# Altium PCB PCB1.PcbDoc
Units mil, origin at the board's own origin, x right, y up, seen from the top; angles counter-clockwise.
Board outline 6000 x 4000 mil, 2 copper layers (Top Layer, Bottom Layer); 60 components, 0 nets, 237 pads, 193 vias.
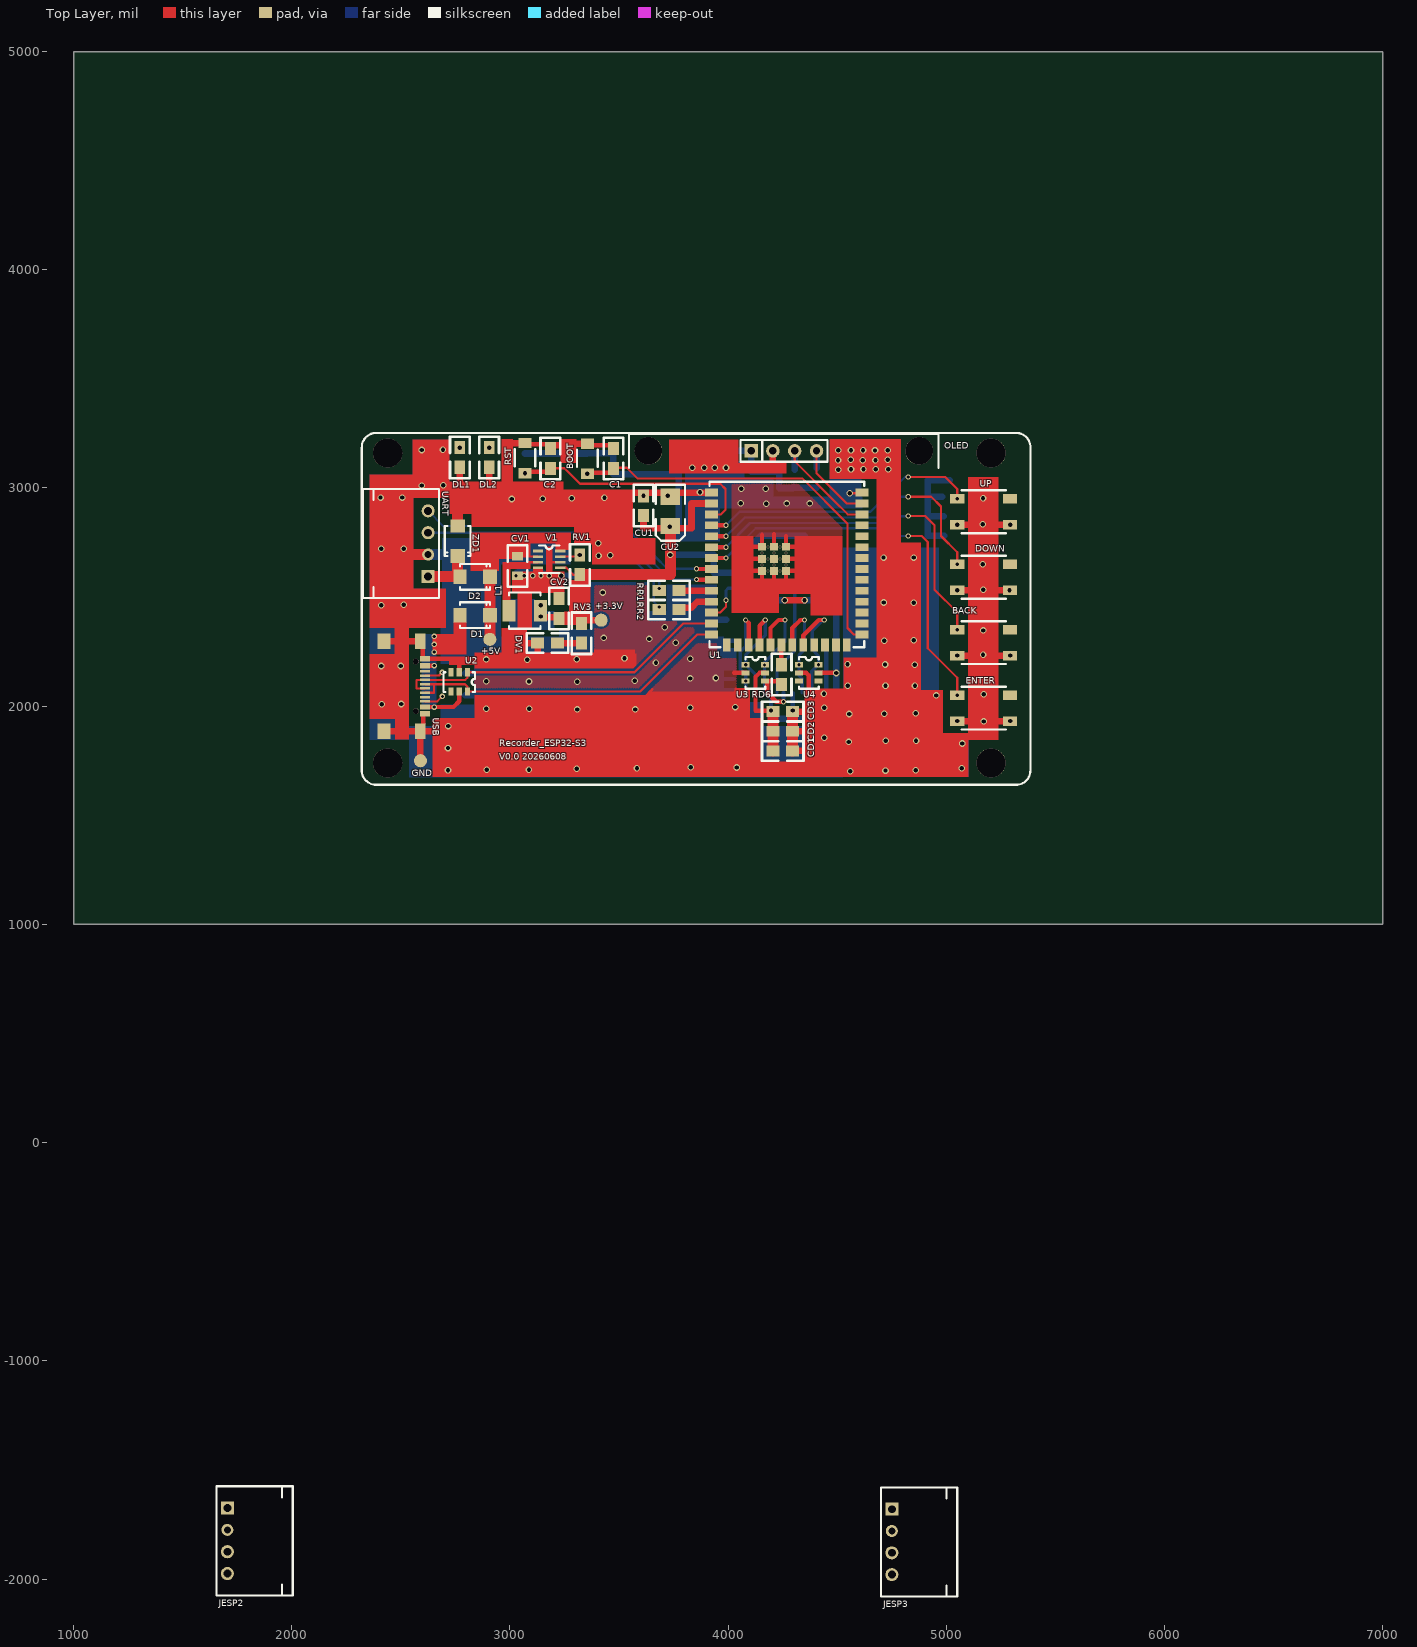
[diagram p0: Top Layer view]
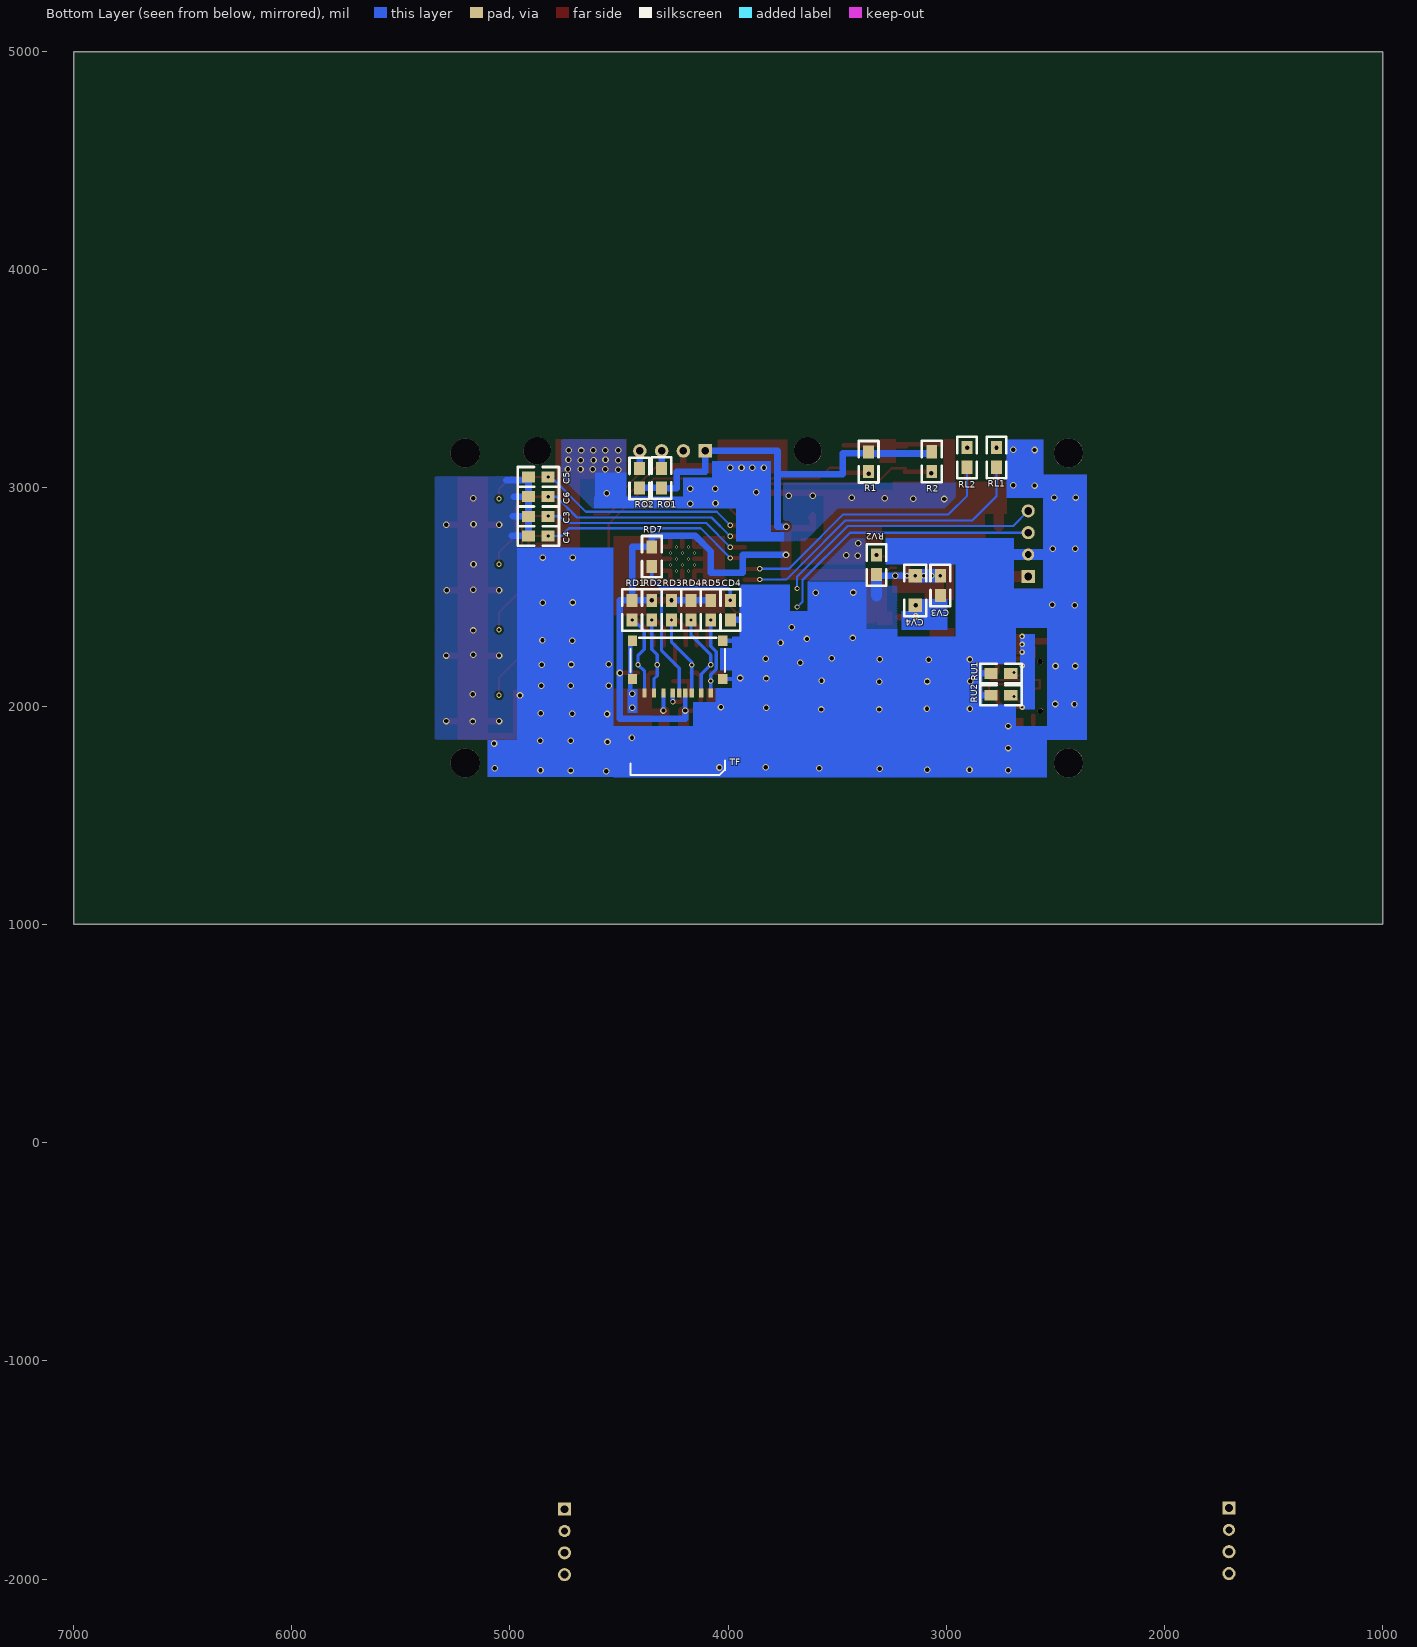
[diagram p1: Bottom Layer view, seen from below]

## Layer stack, top to bottom
Top Solder: solder mask 0.4, Solder Resist, Dk 3.5
Top Layer: signal copper 1.4
Dielectric 1: dielectric 12.6, FR-4, Dk 4.8
Bottom Layer: signal copper 1.4
Bottom Solder: solder mask 0.4, Solder Resist, Dk 3.5

## Board outline
1000,1000 7000,1000 7000,5000 1000,5000

## Design rules (kind name [scope] priority, off if disabled: settings)
Clearance [All] p1: gap=10
PolygonConnect [All] p1: connectstyle=Relief reliefconductorwidth=10 reliefentries=4 polygonreliefangle="90 Angle" airgapwidth=10
RoutingVias [All] p1: holewidth=28 width=50 viastyle="Through Hole" minholewidth=28 minwidth=50 maxholewidth=28 maxwidth=50
SolderMaskExpansion [All] p1: expansion=4
Width [All] p1: maxlimit=10 minlimit=10 preferedwidth=10
30 further rules are at their usual default settings.

## Components (designator, comment, footprint, x,y, rotation, side; value= is the part's Value field where it differs from the comment)
BACK "Comment" SW-4.5*4.5 5050,2350 r0 top
BOOT "Comment" SW-3*4 3355,3202.8 r270 top
C1 "Comment" 0805#1 3475,3180 r270 top
C2 "Comment" 0805#1 3185,3180 r270 top
C3 "Comment" 0805#1 4915,2870 r180 bottom
C4 "Comment" 0805#1 4915,2780 r180 bottom
C5 "Comment" 0805#1 4915,3051 r180 bottom
C6 "Comment" 0805#1 4915,2960 r180 bottom
CD1 "Comment" 0805#2 4205,1795 r0 top
CD2 "Comment" 0805#3 4205,1885 r0 top
CD3 "Comment" 0805#3 4205,1975 r0 top
CD4 "Comment" 0805#4 3990,2485 r270 bottom
CU1 "Comment" 0805#3 3612,2964 r270 top
CU2 "Comment" B-3528 3735,2825.35 r90 top
CV1 "Comment" 0805#5 3035,2597.63 r90 top
CV2 "Comment" 0805#3 3225,2402.63 r90 top
CV3 "Comment" 0805#3 3027.63,2507.63 r90 bottom
CV4 "Comment" 1206 3142.63,2462.63 r90 bottom
D1 "Comment" SMA#1 2908,2417.01 r180 top
D2 "Comment" SMA#1 2908,2592.8 r180 top
DL1 "Comment" 0805#4 2770,3185 r270 top
DL2 "Comment" 0805#4 2905,3185 r270 top
DOWN "Comment" SW-4.5*4.5 5050,2650 r0 top
DV1 "Comment" 0805#4 3217,2289 r180 top
ENTER "Comment" SW-4.5*4.5 5050,2050 r0 top
JESP2 "Comment" XH2.54W-4P#1 1705,-1675 r270 top
JESP3 "Comment" XH2.54W-4P#1 4750,-1680 r270 top
L1 "Comment" 0420 3140.67,2437.63 r180 top
OLED "Comment" OLED-1.3-IIC 4254.92,3170 r0 top
R1 "Comment" 0805#6 3356,3075 r90 bottom
R2 "Comment" 0805#6 3067,3076 r90 bottom
RD1 "Comment" 0805#3 4440,2485 r270 bottom
RD2 "Comment" 0805#3 4350,2485 r270 bottom
RD3 "Comment" 0805#3 4260,2485 r270 bottom
RD4 "Comment" 0805#3 4170,2485 r270 bottom
RD5 "Comment" 0805#3 4080,2485 r270 bottom
RD6 "Comment" 0805#3 4245,2190 r270 top
RD7 "Comment" 0805#7 4350,2730 r270 bottom
RL1 "Comment" 0805#3 2770,3185 r270 bottom
RL2 "Comment" 0805#3 2905,3185 r270 bottom
RO1 "Comment" 0805#3 4306,3090 r270 bottom
RO2 "Comment" 0805#3 4407,3089 r270 bottom
RR1 "Comment" 0805#3 3774,2530 r180 top
RR2 "Comment" 0805#3 3774,2443 r180 top
RST "Comment" SW-3*4 3069,3205.8 r270 top
RU1 "Comment" 0805#1 2795,2150 r180 bottom
RU2 "Comment" 0805#1 2795,2050 r180 bottom
RV1 "Comment" 0805#3 3320,2602.63 r90 top
RV2 "Comment" 0805#3 3320,2602.63 r90 bottom
RV3 "Comment" 0805#3 3328,2379 r270 top
TF "Comment" "TF Card" 4231.69,2124.8 r0 bottom
U1 "Comment" "ESP32-S3 module" 3894.92,2978.82 r0 top
U2 "Comment" "TSOP-6 SRV05-4" 2804.8,2155.58 r270 top
U3 "Comment" "TSOP-6 SRV05-4" 4080,2190 r0 top
U4 "Comment" "TSOP-6 SRV05-4" 4325,2190 r0 top
UART "Comment" XH2.54W-4P#2 2625,2595 r90 top
UP "Comment" SW-4.5*4.5 5050,2950 r0 top
USB "Comment" "TYPE-C USB T" 2569,2091 r270 top
V1 "Comment" TSOT23-8 3180,2672.63 r0 top
ZD1 "Comment" SMA#2 2760,2687.99 r90 top

## Footprints (in the part's own frame and the unit in brackets; to place one, negate y for a bottom-side part, rotate by r counter-clockwise, add the part's x,y. Pads: shape width x height; smd on the part's side, far side on the other; paste and mask are expansions set on the pad)
0420 [mm]
  rect 1.5x2.5 smd paste+0 mask+0.051: 1(0,0) 2(3.7,0)
  silkscreen extent 0,-2.1 3.7,2.1
0805#1 [mil]
  rect 60x50 smd: 2(90,0) GND(0,0)
  silkscreen extent -50,-45 140,45
0805#2 [mil]
  rect 60x50 smd: +3.3V(0,0) GND(90,0)
  silkscreen extent -50,-45 140,45
0805#3 [mil]
  rect 60x50 smd: 1(0,0) 2(90,0)
  silkscreen extent -50,-45 140,45
0805#4 [mil]
  rect 60x50 smd: 1(0,0) GND(90,0)
  silkscreen extent -50,-45 140,45
0805#5 [mil]
  rect 40x50 smd: 1(0,0) 2(90,0)
  silkscreen extent -50,-45 140,45
0805#6 [mil]
  rect 60x50 smd: 1(0,0) +3.3V(90,0)
  silkscreen extent -50,-45 140,45
0805#7 [mil]
  rect 60x50 smd: 2(90,0) +3.3V(0,0)
  silkscreen extent -50,-45 140,45
1206 [mil]
  rect 60x60 smd: 1(0,0) GND(135,0)
  silkscreen extent -50,-50 185,50
B-3528 [mm]
  rect 1.9x2.28 smd paste+0 mask+0.051: 1(0,0) 2(3.42,0)
  silkscreen extent -1.7,-1.7 4.8,1.7
"ESP32-S3 module" [mm]
  rect 1.5x0.9 smd paste+0 mask+0.051: 1(0.75,0) 2(0.75,-1.27) 3(0.75,-2.54) 4(0.75,-3.81) 5(0.75,-5.08) 6(0.75,-6.35) 7(0.75,-7.62) 8(0.75,-8.89) 9(0.75,-10.16) 10(0.75,-11.43) 11(0.75,-12.7) 12(0.75,-13.97) 13(0.75,-15.24) 14(0.75,-16.51) 27(18.25,-16.51) 28(18.25,-15.24) 29(18.25,-13.97) 30(18.25,-12.7) 31(18.25,-11.43) 32(18.25,-10.16) 33(18.25,-8.89) 34(18.25,-7.62) 35(18.25,-6.35) 36(18.25,-5.08) 37(18.25,-3.81) 38(18.25,-2.54) 39(18.25,-1.27) 40(18.25,0)
  rect 0.9x1.5 smd paste+0 mask+0.051: 15(2.515,-17.76) 16(3.785,-17.76) 17(5.055,-17.76) 18(6.325,-17.76) 19(7.595,-17.76) 20(8.865,-17.76) 21(10.135,-17.76) 22(11.405,-17.76) 23(12.675,-17.76) 24(13.945,-17.76) 25(15.215,-17.76) 26(16.485,-17.76)
  rect 0.9x0.9 smd paste+0 mask+0.051: ""(6.6,-9.12) ""(6.6,-7.72) ""(6.6,-6.32) ""(8,-9.12) ""(8,-7.72) ""(8,-6.32) ""(9.4,-9.12) ""(9.4,-7.72) ""(9.4,-6.32)
  silkscreen extent 0.5,-18.01 18.5,1.27
OLED-1.3-IIC [mil]
  round 125.98 hole 125.98: 2(-620.08,0) 2(620.08,0)
  round 62 hole 34: GND(-50,0) SCL(50,0) SDA(150,0)
  rect 62x62 hole 34: VCC(-150,0)
  silkscreen extent -709,-79 709,79
SMA#1 [mm]
  rect 1.6x1.68 smd paste+0 mask+0.051: 1(0,0)
  rect 1.52x1.68 smd paste+0 mask+0.051: 2(3.48,0)
  silkscreen extent 0,-1.5 3.48,1.5
SMA#2 [mm]
  rect 1.6x1.68 smd paste+0 mask+0.051: 1(0,0)
  rect 1.52x1.68 smd paste+0 mask+0.051: GND(3.48,0)
  silkscreen extent 0,-1.5 3.48,1.5
SW-3*4 [mm]
  rect 1.2x1.5 smd paste+0 mask+0.051: 1(0,0) 2(3.5,0)
  silkscreen extent 0.7,-1.2 2.7,1.2
SW-4.5*4.5 [mm]
  rect 1.65x1.1 smd paste+0 mask+0.051: 1(0,0) 2(6.15,0) 3(0,-3) 4(6.15,-3)
  silkscreen extent 0.5,-4 5.65,1
"TF Card" [mm]
  rect 1.1x1.2 smd paste+0 mask+0.051: G(-5.25,-4.45) G(-5.25,0) G(5.25,-4.45) G(5.25,0)
  rect 0.5x1.08 smd paste+0 mask+0.051: G(-0.2,1.64) P1(-3.85,1.64) P2(-2.75,1.64) P3(-1.65,1.64) P4(-0.9,1.64) P5(0.55,1.64) P6(1.65,1.64) P7(2.75,1.64) P8(3.85,1.64)
  silkscreen extent -5.5,-4.8 5.5,11.2
"TSOP-6 SRV05-4" [mm]
  rect 0.95x0.6 smd paste+0 mask+0.051: 1(0,0) 2(0,-0.95) 3(0,-1.9) 4(2.25,-1.9) 5(2.25,-0.95) 6(2.25,0)
  silkscreen extent 0,-2.79 2.29,0.89
TSOT23-8 [mm]
  rect 1.2x0.3 smd paste+0 mask+0.051: 1(-1.3,0.975) 2(-1.3,0.325) 3(-1.3,-0.325) 4(-1.3,-0.975) 5(1.3,-0.975) 6(1.3,-0.325) 7(1.3,0.325) 8(1.3,0.975)
  silkscreen extent -1.2,-1.6 1.2,1.6
"TYPE-C USB T" [mm]
  round 0.65 hole 0.65: 0(-2.89,0) 0(2.89,0)
  rect 1.8x1.2 smd paste+0 mask+0.051: 1(-5.225,0.5) 1(5.225,0.5)
  rect 1.8x1.5 smd paste+0 mask+0.051: 1(-5.225,-3.7) 1(5.225,-3.7)
  rect 0.6x1.15 smd paste+0 mask+0.051: 1(-3.2,1.05) 2(-2.4,1.05) 11(2.4,1.05) 12(3.2,1.05)
  rect 0.3x1.15 smd paste+0 mask+0.051: 3(-1.75,1.05) 4(-1.25,1.05) 5(-0.75,1.05) 6(-0.25,1.05) 7(0.25,1.05) 8(0.75,1.05) 9(1.25,1.05) 10(1.75,1.05)
  silkscreen extent -3.5,-6.28 3.5,-6.28
XH2.54W-4P#1 [mil]
  round 60 hole 36: 3(200,0) 4(300,0)
  rect 60x60 hole 36: GND(0,0)
  round 55.12 hole 31.5: VCC(100,0)
  silkscreen extent -100,-50 400,300
XH2.54W-4P#2 [mil]
  round 55.12 hole 31.5: GND(100,0)
  round 60 hole 36: RXD(300,0) TXD(200,0)
  rect 60x60 hole 36: VCC(0,0)
  silkscreen extent -100,-50 400,300

## Free pads (board coordinates)
  round 133.86 hole 133.86: 2(2440,1740) 2(2440,3160) 2(5205,1740) 2(5205,3160)
  round 60 smd: +3.3V(3418,2394) +5V(2908,2306) GND(2590,1750)

## Via types
v1: diameter 30, hole 20, Top Layer to Bottom Layer, 141 vias
v2: diameter 24, hole 15, Top Layer to Bottom Layer, 33 vias
v3: diameter 13.78, hole 9.84, Top Layer to Bottom Layer, 12 vias
v4: diameter 25, hole 14, Top Layer to Bottom Layer, 7 vias

## Nets (pads, with @x,y where several pads share a name; then routed paths per layer and width w, separated by ;. In a path a pad name is that pad's centre, name@x,y a point inside that pad or via, vN(x,y) a via of type N, cw(c..) or ccw(c..) an arc to the next point about the centre after c; other vN are vias at no path point)
pads on no net: BACK.1 BACK.2 BACK.3 BACK.4 BOOT.1 BOOT.2 C1.2 C1.GND C2.2 C2.GND C3.2 C3.GND C4.2 C4.GND C5.2 C5.GND C6.2 C6.GND CD1.+3.3V CD1.GND CD2.1 CD2.2 CD3.1 CD3.2 CD4.1 CD4.GND CU1.1 CU1.2 CU2.1 CU2.2 CV1.1 CV1.2 CV2.1 CV2.2 CV3.1 CV3.2 CV4.1 CV4.GND D1.1 D1.2 D2.1 D2.2 DL1.1 DL1.GND DL2.1 DL2.GND DOWN.1 DOWN.2 DOWN.3 DOWN.4 DV1.1 DV1.GND ENTER.1 ENTER.2 ENTER.3 ENTER.4 JESP2.3 JESP2.4 JESP2.GND JESP2.VCC JESP3.3 JESP3.4 JESP3.GND JESP3.VCC L1.1 L1.2 OLED.2 OLED.GND OLED.SCL OLED.SDA OLED.VCC R1.1 R1.+3.3V R2.1 R2.+3.3V RD1.1 RD1.2 RD2.1 RD2.2 RD3.1 RD3.2 RD4.1 RD4.2 RD5.1 RD5.2 RD6.1 RD6.2 RD7.2 RD7.+3.3V RL1.1 RL1.2 RL2.1 RL2.2 RO1.1 RO1.2 RO2.1 RO2.2 RR1.1 RR1.2 RR2.1 RR2.2 RST.1 RST.2 RU1.2 RU1.GND RU2.2 RU2.GND RV1.1 RV1.2 RV2.1 RV2.2 RV3.1 RV3.2 TF.G TF.P1 TF.P2 TF.P3 TF.P4 TF.P5 TF.P6 TF.P7 TF.P8 U1. U1.1 U1.2 U1.3 U1.4 U1.5 U1.6 U1.7 U1.8 U1.9 U1.10 U1.11 U1.12 U1.13 U1.14 U1.15 U1.16 U1.17 U1.18 U1.19 U1.20 U1.21 U1.22 U1.23 U1.24 U1.25 U1.26 U1.27 U1.28 U1.29 U1.30 U1.31 U1.32 U1.33 U1.34 U1.35 U1.36 U1.37 U1.38 U1.39 U1.40 U2.1 U2.2 U2.3 U2.4 U2.5 U2.6 U3.1 U3.2 U3.3 U3.4 U3.5 U3.6 U4.1 U4.2 U4.3 U4.4 U4.5 U4.6 UART.GND UART.RXD UART.TXD UART.VCC UP.1 UP.2 UP.3 UP.4 USB.0 USB.1 USB.2 USB.3 USB.4 USB.5 USB.6 USB.7 USB.8 USB.9 USB.10 USB.11 USB.12 V1.1 V1.2 V1.3 V1.4 V1.5 V1.6 V1.7 V1.8 ZD1.1 ZD1.GND
copper on no net: | length 36801.2
  Top Layer w10: 2610.34,2022.1 2667.1,2022.1 v4(2690,2045) ; 2610.34,2061.47 2652,2061.47 2652,2100.84 ; 2610.34,2081.16 2572,2081.16 2572,2120.53 2610.34,2120.53 2795.53,2120.53 2804.8,2129.8 2804.8,2155.58 3570.58,2155.58 3793.82,2378.82 3924.45,2378.82 ; 2610.34,2100.84 2652,2100.84 ; 2610.34,2140.21 2675.21,2140.21 v4(2690,2155) ; 3047.8,2685.42 3128.82,2685.42 ; 3071,2647 3083.83,2659.83 3128.82,2659.83 ; 3185,3090 3250,3090 3321,3019 3964,3019 3988,2995 3988,2900 3966.82,2878.82 3924.45,2878.82 ; 3231.18,2634.24 3258.39,2634.24 3290,2602.63 3335,2602.63 ; 3231.18,2685.42 v1@3322.8,2685.42 ; 3478,3093 3535,3093 3584,3044 4339,3044 4547,2836 4547,2358 4576.18,2328.82 4613.43,2328.82 ; 3527,2177 3563,2177 3573,2187 ; 3615,2040 3653.51,2078.51 ; 3774,2539 3784.18,2528.82 ; 3784,2461 3795,2450 ; 3924.45,2328.82 3858.82,2328.82 3597,2067 2804.8,2067 2804.8,2090.2 2794.16,2100.84 2652,2100.84 ; 3924.45,2428.82 3963.82,2428.82 3990,2455 v2(3990,2485) ; 4035,2040 4035,2081.38 ; 4304.92,3170 4304.92,3122.08 4483,2944 4548.18,2878.82 4613.43,2878.82 ; 4404.92,3170 4404.92,3067.08 4511,2961 4543.18,2928.82 4613.43,2928.82 ; v1@4495.4,2152.6 v1(4496,2152) ; v1(4557,2976) 4610.61,2976 ; v2(4825,2780) 4887,2780 4915,2752 4915,2265 5050,2130 v2(5050,2050) ; v2(4825,2871) 4904,2871 4945,2830 4945,2535 5050,2430 v2(5050,2350) ; v2(4825,2960) 4930,2960 4975,2915 4975,2780 5050,2705 v2(5050,2650) ; v2(4825,3050) 4995,3050 5050,2995 v2(5050,2950)
  Top Layer w20: 2600,2227 2600,2267 ; 2602,1917 2602,1957 ; 2610.34,2216.98 2743.02,2216.98 ; 2610.85,1996 v4(2653,1996) 2741,1996 2767.4,2022.4 2767.4,2067 ; 2610.85,2186 v4(2653,2186) ; 2767.4,2155.58 2767.4,2192.6 ; 3075,3200 3185,3200 ; v1@3080,3075 3190,3075 ; 3360,3195 3470,3195 ; v1@3365,3070 3475,3070 ; v2@3856.18,2578.82 3924.45,2578.82 ; v2@3856.18,2628.82 3924.45,2628.82 ; 3924.45,2678.82 v2(3990,2678.82) ; 3924.45,2728.82 v2(3990,2728.82) ; 3924.45,2778.82 v2(3990,2778.82) ; 3924.45,2828.82 v2(3990,2828.82) ; 4027.03,2152.6 4080,2152.6 ; v2(4080,2395) 4093.94,2381.06 4093.94,2279.61 ; 4103.76,2619.76 4154.76,2619.76 4154.76,2575.24 ; 4109,2730 4154.76,2730 4154.76,2785.24 ; 4110.12,2674.88 4154.76,2674.88 ; 4143.94,2279.61 4143.94,2368.94 v2(4170,2395) ; 4168.58,2152.6 4143.6,2152.6 4125,2134 4125,1979 v1@4201,1979 ; 4193.94,2279.61 4193.94,2357.94 4231,2395 v2(4260,2395) ; 4209.88,2574.12 4209.88,2619.76 ; 4209.88,2730 4209.88,2789.05 ; 4243.94,2191.06 4243.94,2279.61 ; 4251,2114 4178.58,2114 4178.58,2061.42 4220,2020 v2(4253.35,2020) ; 4265,2575 4265,2619.76 4313.76,2619.76 ; 4265,2674.88 4317.12,2674.88 ; 4265,2779.42 4265,2730 4313,2730 ; 4293.94,2279.61 4293.94,2357.94 4331,2395 v2(4350,2395) ; 4325,2152.6 4357.4,2152.6 4369,2141 4369,2064 ; 4343.94,2279.61 4343.94,2323.94 4415,2395 v2(4440,2395) ; 4413.58,2152.6 v1@4495.4,2152.6
  Top Layer w30: 2423.33,1885.29 2488.29,1885.29 ; 2423.33,2296.71 2490.71,2296.71 ; 2511.29,2296.71 2588.68,2296.71 ; 2516.71,1885.29 2588.68,1885.29 ; 2588.68,1751.32 2588.68,1885.29 ; 2657.71,1885.29 2588.68,1885.29 ; 2770,3007 2770,3095 ; 2905,3012 2905,3095 ; 2999.2,3205.8 3069,3205.8 ; 3060,2289 3127,2289 3127,2225 ; v1@3150,2407.63 3220,2407.63 ; 3186,3195 3275,3195 ; 3217,2289 3328,2289 ; 3264.2,3202.8 3355,3202.8 ; 3334,2394 3418,2394 ; 3531,2979 3612,2979 ; v1@3610,2978.82 3924.45,2978.82 ; 3612,2874 3612,2816 3725.65,2816 3832,2816 3832,2928.82 3924.45,2928.82 ; 3615,2863 3619,2863 ; 3774,2528.82 3924.45,2528.82 ; 3795,2450 3830,2450 3858.82,2478.82 3924.45,2478.82 ; 4204.92,3096.08 4204.92,3170 ; v1(4260,2485) v1(4350,2485) ; 4295,1795 4373,1795 ; 4295,1885 4370,1885 ; v1@4295,1975 4351,1975 ; v1(5050,1931.89) 5116.89,1931.89 ; v1(5050,2231.89) 5121.11,2231.89 ; v1(5050,2531.89) 5114.11,2531.89 ; v1(5050,2831.89) 5135.11,2831.89 ; 5217.89,1931.89 v1(5292.13,1931.89) ; 5225.11,2531.89 v1@5292.13,2531.89 ; 5225.11,2831.89 v1(5292.13,2831.89) ; 5227.11,2231.89 v1(5292.13,2231.89)
  Top Layer w50: 2514,2695 2625,2695 ; 2625,2595 2760,2595 ; 2760,2595.79 2760,2687.99 ; 2760,2825 2760,2898 ; 2908,2306 2908,2417.01 2908,2592.8 ; 3320,2602.63 3735,2602.63 v1@3735,2820.35 ; 4205,1795 v1@4205,1975 ; 4295,1795 v1@4295,1975
  Bottom Layer w10: 2625,2795 3442,2795 3659,2578 3659,2479 v2(3684,2454) ; 2625,2895 2695,2825 3453,2825 3684,2594 v2(3684,2539) ; 2770,3095 2770,2962 2881,2851 3463,2851 3661,2653 3734,2580 v2(3855,2580) ; 2905,3095 2905,2964 2990,2879 3472,2879 3665,2686 3721,2630 v2(3855,2630) ; 3125,2475 v1@3140,2460 ; 3632,2552 3632,2568 ; v2(3990,2678.82) 4126.18,2815 4729,2815 4764,2780 v2(4825,2780) ; v2(3990,2728.82) 4100.18,2839 4741,2839 4772,2870 v2@4825,2870 ; v2(3990,2778.82) 4076.18,2865 4693,2865 4788,2960 v2(4825,2960) ; v2(3990,2828.82) 4052.18,2891 4652,2891 4812,3051 v2@4825,3051 ; v2@4435,2395 v2(4440,2395)
  Bottom Layer w15: v2(3990,2485) 3990,2530 4000,2540 4305,2540 ; v2(4080,2115.2) 4080,2145 4055,2170 4055,2250 4080,2275 v2(4080,2395) ; 4080.12,2060.24 v2@4080.12,2115.2 ; 4123.43,2060.24 4123.43,2146.57 v2(4080,2190) 4080,2235 4170,2325 v2(4170,2395) ; 4166.73,2060.24 v2(4166.73,2188.15) 4166.73,2201.73 4260,2295 v2(4260,2395) ; 4223.82,2060.24 4223.82,2173.82 4305,2255 4305,2540 ; 4339.96,2060.24 4339.96,2125.04 4325,2140 v2(4325,2190) 4325,2235 4350,2260 v2(4350,2395) ; 4350,2640 4350,2585 4305,2540 ; 4383.27,2060.24 4383.27,2159.68 v2(4413.58,2190) 4413.58,2231.42 4385,2260 4385,2345 v2@4435,2395
  Bottom Layer w20: v4(2653,1996) v4(2653,2186) v4(2653,2320) ; 3974,2300 4025,2300 ; 3982.8,2124.8 4025,2124.8 ; v1(4196.26,1980) 4196.26,2060.24 ; v2(4253.35,2020) 4253.35,2060.24 ; v1(4296.65,1980) 4296.65,2060.24 ; v1@4449.39,2059 4449.39,2299
  Bottom Layer w30: 2795,2050 2870,2050 ; 2795,2150 2866,2150 ; 3069,3158 3353,3158 ; v2(3142.63,2597.63) v1(3235,2597.63) 3315,2597.63 ; 3355,3160 3474,3160 3474,3063 3774,3063 3774,3170 4104.92,3170 4104.92,3074.92 4234.92,3074.92 4234.92,2999 4294.84,2999 4300.92,3005.08 ; v1(3733,2823) 3774,2823 3774,3075 ; v1(3735,2693) 3933,2693 3933,2612 4080,2612 4080,2710 4150,2780 4350,2780 4350,2730 4440,2730 4440,2485 ; 3930,2395 3990,2395 ; 4080,2485 v1(4260,2485) ; v1(4196.26,1980) 4196.26,1941.74 4496,1941.74 4496,2485 4440,2485 ; 4304.92,3084.08 4304.92,3170 ; 4306,3000 4406,3000 ; v1(4350,2485) 4440,2485 ; 4404.92,3091.08 4404.92,3170 ; 4915,2960 4981.51,2960 ; 4916,2871 4988.02,2871 ; 4991,2780 4915,2780 4915,3036.08 5016.05,3036.08
  Bottom Layer w50: 2528,2695 2625,2695 2723,2695 ; 3320,2504.45 3320,2602.63
  Bottom Layer w60: 3040,2597.63 v2(3142.63,2597.63)
  other v1: 4559,1701 4721,1705 2716,1707 4860,1707 2894,1709 3087,1709 3306,1713 5070,1715 3582,1716 4040,1719 3828,1720 2716,1808 5073,1829 4553,1836 4861,1841 4722,1842 4441,1855 2717,1909 5171,1930 4555,1964 4715,1966 4859,1968 3308,1985 3574,1985 2892,1988 3089,1988 4440,1992 3826,1993 4033,1996 2413,2008 2501,2010 4954,2049 5171,2054 4439,2057 4548,2093 4721,2094 4856,2094 3308,2112.39 3087.29,2113 2891,2114 3572,2116.18 3826,2127 3944,2129 2410,2184 2500,2184 4855,2190 4719,2191 4547,2192 3669,2198.79 3080,2213 2892,2214 3306,2215 3827,2217 3525,2219 5168,2236 3760,2291 4715,2299 4851,2302 3639,2308 3429,2312.59 5169,2347 3709,2362.44 3141,2411 3141,2462 2411,2463 2514,2464 4850,2474 4713,2475 3598,2520 3426,2521 5289,2531.89 5169,2534 5167,2651 4712,2681 4850,2681 3406,2690 3459.64,2691 3320,2692.63 2410,2722 2513,2722 3404,2746.64 5167,2834 4174,2928 4269,2929 4373.51,2929 4058,2929.85 3009,2949.3 3151,2951 3283,2953 5168,2953 3433,2955 2407,2956 2506,2956 3612,2964 3723,2964 3871,2980 4060,2995.73 4173,2997 2596,3011 2694,3013 3355,3065 3069,3068 4504,3083.48 4563,3085 4620.02,3085 4676.59,3085 4734.15,3086 3836,3092 3890,3092 3939,3092 3990,3092 4503.63,3127 4617,3127.24 4675,3127.44 4562.19,3129 4732,3129.1 4673,3171.92 4504,3172.63 4563,3173 4618.12,3173 4731,3173.36 2596,3174 2693,3175 2770,3185 2905,3185
  other v2: 3027.63,2597.63 3066,2597.63 3104,2597.63 3180,2597.63
  other v3: 4182.32,2619.76 4237.44,2619.76 4154.76,2647.32 4209.88,2647.32 4265,2647.32 4182.32,2674.88 4237.44,2674.88 4154.76,2702.44 4209.88,2702.44 4265,2702.44 4182.32,2730 4237.44,2730
  other v4: 2653,2248 2653,2283

## Polygon pours and split planes (outlines as drawn)
no net on Bottom Layer "Bottom Layer-No Net" (hatched 45Degree grid 8 track 10, pour order 28): 3365,2547.63 3365,2352.63 3230,2352.63 3230,2547.63 3365,2547.63
no net on Bottom Layer "Bottom Layer-No Net" (hatched 45Degree grid 8 track 10, pour order 34): 4760,3210 4760,3080 4760,3050 4670,2960 4620,2910 4610,2910 4610,3070 4470,3070 4470,3220 4760,3220 4760,3210
no net on Bottom Layer "Bottom Layer-No Net" (hatched 45Degree grid 8 track 10, pour order 36): 2960,3020 2960,2970 2960,2960 3010,2910 3500,2910 3650,2760 3750,2760 3750,3020 2960,3020
no net on Bottom Layer "Bottom Layer-No Net" (hatched 45Degree grid 8 track 10, pour order 40): 4970,3050 5340,3050 5340,1850 4970,1850 4970,3050
no net on Bottom Layer "Bottom Layer-No Net" (hatched 45Degree grid 8 track 10, pour order 46): 3375,2550 3375,2765 3435,2765 3640,2560 3640,2545 3375,2545 3375,2550
no net on Top Layer "Bottom Layer-No Net" (hatched 45Degree grid 8 track 10, pour order 38): 2840,2155.58 3570.58,2155.58 3793.82,2378.82 3840,2378.82 3840,2310 3597,2067 2840,2067 2840,2155.58
no net on Top Layer "Bottom Layer-No Net" (hatched 45Degree grid 8 track 10, pour order 42): 3390,2245 3390,2325 3390,2550 3630,2550 3630,2380 3635,2385 3775,2385 3771,2385 3558,2172 3485,2245 3390,2245
no net on Top Layer "Bottom Layer-No Net" (hatched 45Degree grid 8 track 10, pour order 44): 3620,2045 3860,2285 3945,2285 3945,2215 4035,2215 4035,2045 3620,2045
no net on Top Layer "Bottom Layer-No Net" (hatched 45Degree grid 8 track 10, pour order 50): 4020,2780 4020,3015 4320,3015 4520,2815 4520,2780 4020,2780

## Other copper
Top Layer:
  rectangle: 4529,2080 4679,2222
  region: 2474,1942 2474,1847 2537,1847 2537,1942
  region: 2470,2367 2470,2240 2537,2240 2537,2367
  region: 2356,2240 2356,1942 2537,1942 2537,2240
  region: 2356,3061 2356,2359 2557,2359 2557,3061
  region: 3248,2433 3248,2373 3317,2373 3317,2433
  region: 3271,2578 3271,2403 3368,2403 3368,2578
  region: 3209,2748 3209,2715 3279,2715 3279,2748
  region: 3058,2747 3058,2689 3094,2689 3094,2747
  region: 3191,2666 3191,2654 3208,2654 3208,2666
  region: 3105,2629 3105,2616 3152,2616 3152,2629
  region: 3035,2521 3035,2349 3100,2349 3100,2521
  region: 3010,2579 3010,2519 3058,2519 3058,2579
  region: 3059,2617 3059,2571 3111,2571 3111,2617
  region: 3058,2617 3058,2519 3250,2519 3250,2617
  region: 3165,2731 3165,2612 3194,2612 3194,2731
  region: 2970,2752.63 2970,2707.63 3060,2707.63 3060,2752.63
  region: 2970,2795 2970,2745 3279,2745 3279,2795
  region: 2820,2795 2820,2675 2970,2675 2970,2795
  region: 2820,2675 2820,2620 2950,2620 2950,2675
  region: 2970,2710 2970,2675 3010,2675 3010,2710
  rectangle: 2645,2237 2801,2330
  rectangle: 2550,2359 2707,2539
  rectangle: 2554,2953 2724,3222
  rectangle: 2741,2327 2801,2386
  rectangle: 3729,3067 4048,3221
  rectangle: 4045,3067 4267,3114
  rectangle: 5100,1845 5240,3050
  rectangle: 4679,1675 4792,3224
  rectangle: 4791,1675 4883,2749
  rectangle: 4883,1675 5102,1876
  rectangle: 4883,1874 4985,2074
  rectangle: 4465,3042 4681,3224
  rectangle: 4350,1675 4679,2080
  rectangle: 4150,1675 4350,1747
  rectangle: 2646,1675 4152,1946
  rectangle: 2723,2880 3564,2994
  rectangle: 2720,2992 3246,3030
  rectangle: 2961,3025 3013,3225
  rectangle: 3231,3115 3306,3225
  rectangle: 2838,1943 4099,2052
  rectangle: 2838,2172 3558,2245
  rectangle: 3294,2741 3564,2881
  rectangle: 3376,2650 3668,2771
  rectangle: 2823,2821 3296,2881
  rectangle: 3385,2241.63 3573,2260
  rectangle: 3555,2187 3579.31,2242
  rectangle: 3555,2182 3568,2187
  rectangle: 3642,2040 4035,2067
  rectangle: 3634,2050 3644,2062
  rectangle: 4032.7,2052 4099,2084
  rectangle: 4015,2426 4116,2780
  rectangle: 4303.7,2515 4525,2780
  rectangle: 4112,2515 4311,2586
  rectangle: 4377,2416 4525,2521
  rectangle: 4111,2426 4233,2523
  rectangle: 2962,2239 3078,2359
  rectangle: 2720,2188 2842,2227
  rectangle: 2966,2486 3002,2660
  rectangle: 3002,2628 3095,2660
Bottom Layer:
  region: 2995,2492 2995,2435 3114,2435 3114,2492
  region: 2995,2435 2995,2350 3205,2350 3205,2435
  rectangle: 2595,1985 2645,2330
  rectangle: 2356,2359 2558,3061
  rectangle: 2356,1846 2538,2359
  rectangle: 2556,2359 2959,2539
  rectangle: 2689,2539 2959,2770
  rectangle: 2959,2649 3278,2770
  rectangle: 2554,2953 2724,3223
  rectangle: 3803,2798 3963,3123
  rectangle: 3744.33,2755 3963,2798
  rectangle: 4526,1675 4967,2728
  rectangle: 4962,1676 5103,1846
  rectangle: 2538,1674 4526,1909
  rectangle: 4416,1969 4461,2079
  rectangle: 2835,1909 3982,2320
  rectangle: 3982,1907 4057,2084
  rectangle: 4057,1907 4161,2019
  rectangle: 3717,2317 3949,2558
  rectangle: 3365,2317 3717,2435.28
  rectangle: 3225,2316 3368,2352.63
  rectangle: 2681,2194 2959,2359
  rectangle: 2681,1909 2855,2008
  rectangle: 3365,2434 3637,2553
  rectangle: 3982,2163 4038,2267
  rectangle: 3370,2552 3632,2568
  rectangle: 3963,2906 4075,3123
  rectangle: 4073,2906 4207,3047
  rectangle: 4206,2906 4615.72,2960
  rectangle: 4465,2954.85 4610,3070.75

## Silkscreen, mask and mechanical layers (free items; w line width, h text height)
Top Overlay:
  lines w10: 2321.02,1707.92 ccw(c2385.95,1704.97) 2388,1640 ; 2321.1,1707.83 2321.1,3185.02 cw(c2386.05,3187.05) 2389,3251.98 ; 2382,3252.05 5318,3252.05 cw(c5320.05,3187.08) 5384.98,3184.13 ; 2388.93,1640 5317,1640 ccw(c5319.95,1704.93) 5384.92,1706.98 ; 5385,1708 5385,3184.11
  text "+3.3V" at 3390,2443.85 h30
  text "+5V" at 2868,2237 h30
  text "Recorder_ESP32-S3" at 2952,1817 h30
  text "V0.0 20260608" at 2950,1755 h30
  text "GND" at 2549,1679 h30